# Altium PCB PCB1.PcbDoc
Units mm, origin at the board's own origin, x right, y up, seen from the top; angles counter-clockwise.
Board outline 76.45 x 61.59 mm, 2 copper layers (Top Layer, Bottom Layer); 11 components, 11 nets, 33 pads, 4 vias.
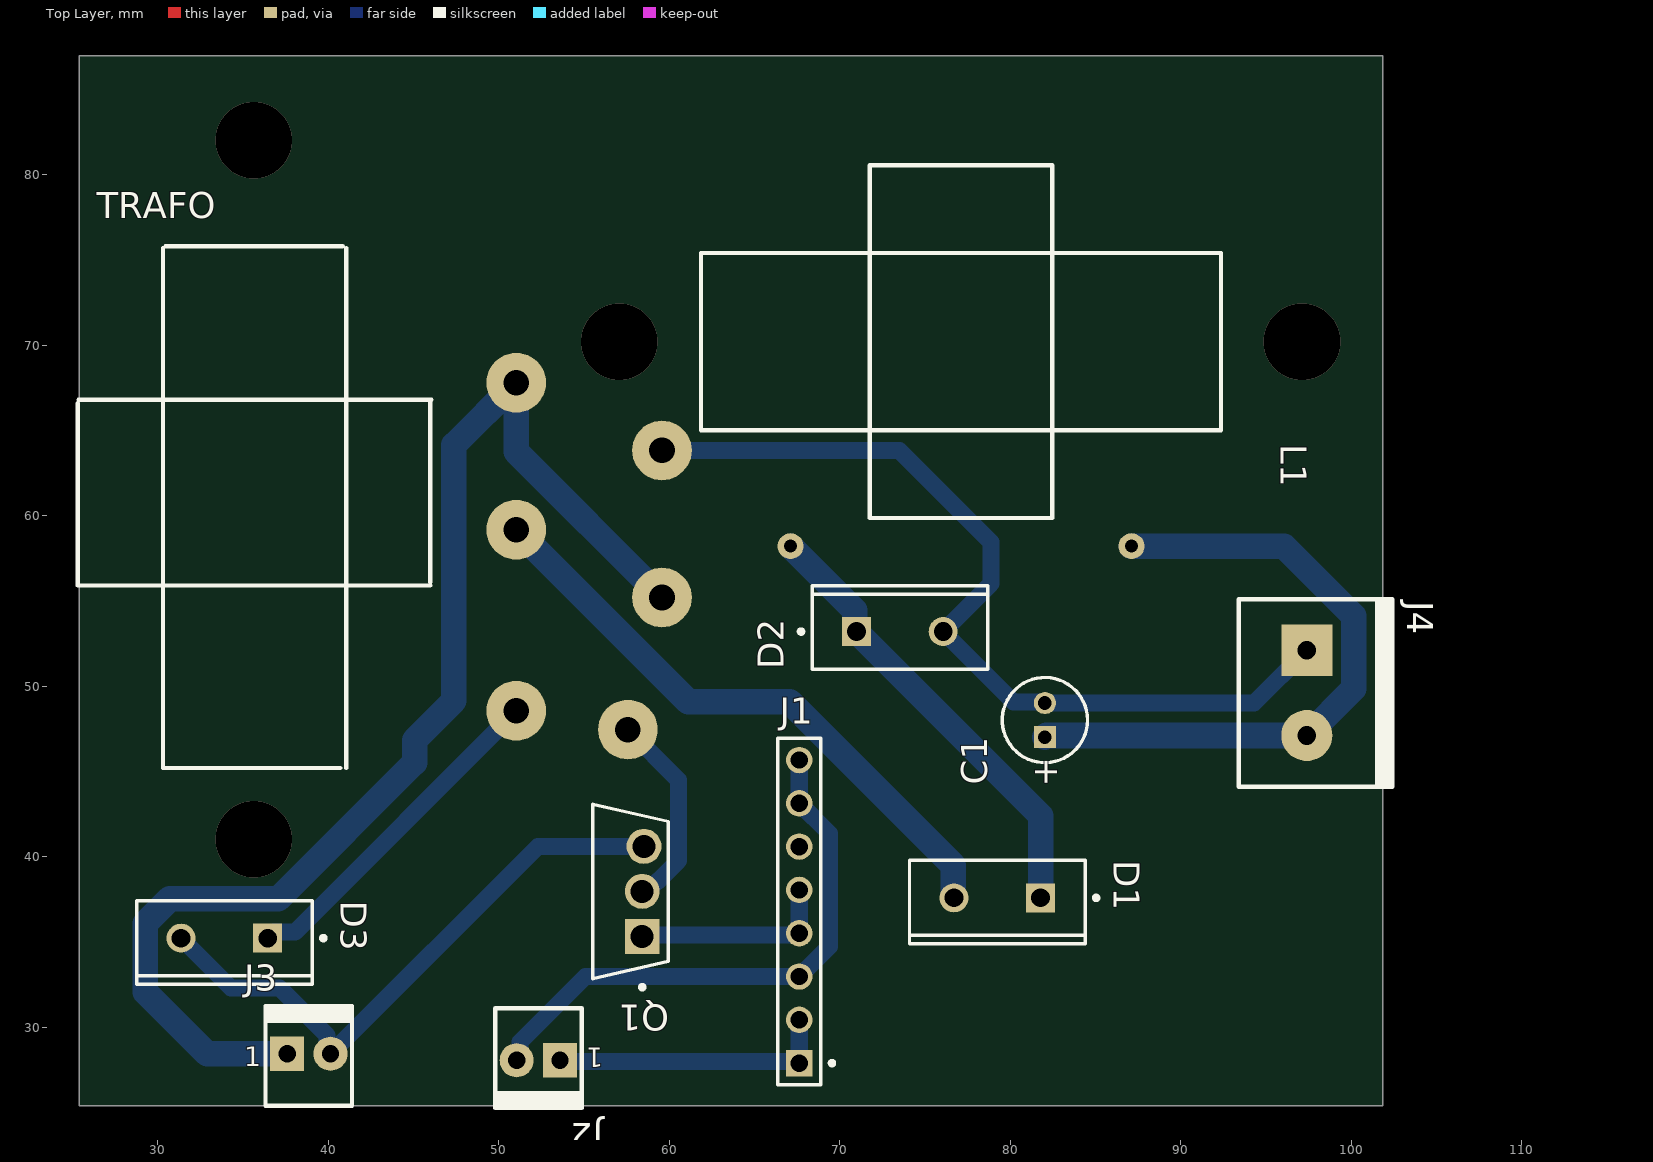
[diagram p0: Top Layer view]
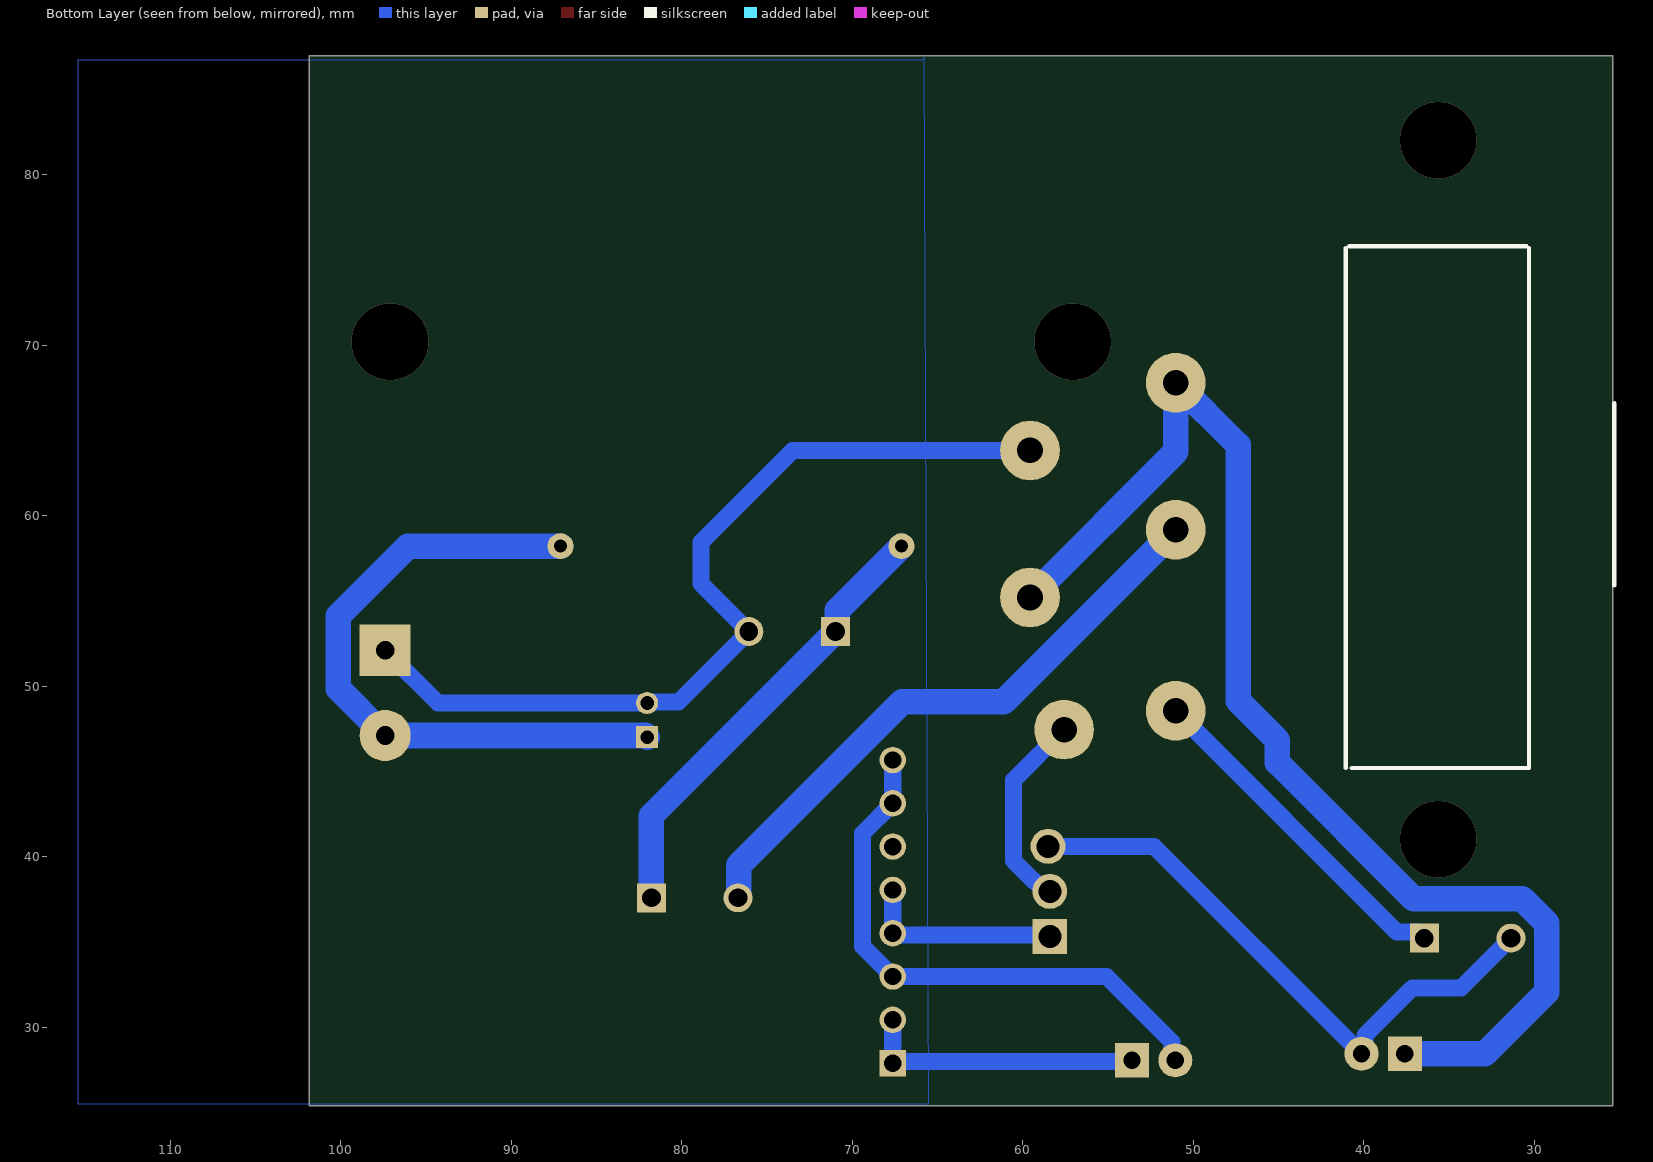
[diagram p1: Bottom Layer view, seen from below]

## Layer stack, top to bottom
Top Solder: solder mask 0.0102, Solder Resist, Dk 3.5
Top Layer: signal copper 0.0356
Dielectric 1: dielectric 0.32, FR-4, Dk 4.8
Bottom Layer: signal copper 0.0356
Bottom Solder: solder mask 0.0102, Solder Resist, Dk 3.5

## Board outline
25.4,25.4 25.4,86.995 101.854,86.995 101.854,25.4

## Design rules (kind name [scope] priority, off if disabled: settings)
Clearance [All] p1: gap=0.5 ignorepadtopadclearanceinfootprint=FALSE
Height [All] p1: minheight=0 maxheight=35 prefheight=12.7
PlaneConnect [All] p1: planeconnectstyle=Relief reliefexpansion=0.508 reliefentries=4 reliefconductorwidth=0.5 reliefairgap=0.5
PolygonConnect [All] p1: connectstyle=Relief reliefconductorwidth=0.5 reliefentries=4 polygonreliefangle="90 Angle" airgapwidth=0.5
RoutingVias [All] p1: holewidth=0.711 width=1.27 viastyle="Through Hole" minholewidth=0.711 minwidth=1.27 maxholewidth=5 maxwidth=5
SolderMaskExpansion [All] p1: expansion=0.102 istentingtop=FALSE
SupplyNets "Schematic Supply Nets_2" [InNet('GND')] p1: voltage=0.000
SupplyNets "Schematic Supply Nets_1" [InNet('GND_P')] p2: voltage=0.000
SupplyNets "Schematic Supply Nets" [InNet('GND_S')] p3: voltage=0.000
Width [ALL - (InNet('NetD1_3') OR InNet('NetD1_1') OR InNet('12V5') OR InNet('100V'))] p1: maxlimit=1 minlimit=1 preferedwidth=1
Width Width_S [(InNet('NetD1_3') OR InNet('NetD1_1') OR InNet('12V5'))] p2: maxlimit=1.5 minlimit=1.5 preferedwidth=1.5
Width Width_P [InNet('100V')] p3: maxlimit=1.5 minlimit=1.5 preferedwidth=1.5
28 further rules are at their usual default settings.

## Components (designator, comment, footprint, x,y, rotation, side; value= is the part's Value field where it differs from the comment)
C1 "4.7uF" Capacitor 82.042,48.022 r90 top
D1 "D1" MUR840 79.248,37.542 r270 top
D2 "D2" MUR840 73.533,53.263 r90 top
D3 "D3" MUR840 33.909,35.179 r270 top
J1 "header 8pin" "Header 8pin" 67.631,36.787 r90 top
J2 "Con_Molex_2_pin" CON_MOLEX_2_vias 53.594,28.067 r180 top
J3 "VIN" CON_MOLEX_2_vias 37.592,28.448 r0 top
J4 "VOUT" Borne_KRE_2pin 97.409,52.117 r270 top
L1 "500uH" Indutor 77.122,70.223 r270 top
Q1 "IRF740PBF" FP-X15-0364-MFG 57.735,37.973 r180 top
TRAFO "Trafo" Trafo_NEE_30/14 35.628,61.539 r0 top

## Footprints (in the part's own frame and the unit in brackets; to place one, negate y for a bottom-side part, rotate by r counter-clockwise, add the part's x,y. Pads: shape width x height; smd on the part's side, far side on the other; paste and mask are expansions set on the pad)
Borne_KRE_2pin [mm]
  rect 3x3 hole 1.1: 1(0,0)
  round 3 hole 1.1: 2(5,0)
  silkscreen extent -3,-4 8,5
Capacitor [mm]
  rect 1.3x1.3 hole 0.8: 1(-1,0)
  round 1.3 hole 0.8: 2(1,0)
  silkscreen extent -2.5,-2.5 2.5,2.5, body extent -2.5,-2.5 2.45,2.5, height 12
CON_MOLEX_2_vias [mm]
  rect 2x2 hole 1.016: 1(0,0)
  round 2 hole 1.016: 2(2.54,0)
  silkscreen extent -1.28,-3.05 3.85,2.8
FP-X15-0364-MFG [mm]
  rect 2.05x2.05 hole 1.35 paste-2539.97 mask+0: 1(-0.685,2.64)
  round 2.05 hole 1.35 paste-2539.97 mask+0: 2(-0.685,0) 3(-0.785,-2.64)
  silkscreen extent -2.22,-5.12 2.22,5.74, body extent -2.42,-5.36 2.42,5.36, height 0.25
"Header 8pin" [mm]
  rect 1.55x1.55 hole 1.016: 1(-8.89,0)
  round 1.55 hole 1.016: 2(-6.35,0) 3(-3.81,0) 4(-1.27,0) 5(1.27,0) 6(3.81,0) 7(6.35,0) 8(8.89,0)
  silkscreen extent -10.16,-2.05 10.16,1.27
Indutor [mil]
  round 60 hole 30: 1(472.44,-393.7) 2(472.44,393.7)
  silkscreen extent -407,-600 407,600, body extent -407,-599 406,599, height 1217
MUR840 [mm]
  rect 1.7x1.7 hole 1.1: 1(-0.05,2.54)
  round 1.7 hole 1.1: 3(-0.05,-2.54)
  silkscreen extent -2.25,-5.15 2.64,5.93, body extent -2.23,-5.15 2.62,5.15, height 19.05
Trafo_NEE_30/14 [mm]
  round 3.5 hole 1.5: P1(15.4,6.275) P2(21.95,-14.075) S1(15.4,-2.35) S2(23.95,2.3) T1(15.4,-12.975) T2(23.95,-6.325)
  silkscreen extent -10.33,-16.33 10.42,14.28, body extent -10.33,-16.33 10.47,14.17, height 28

## Part data
C1: library part "Capacitor Eletro"
D1 D2 D3: library part mur840
J3: library part Con_Molex_2_pin
J4: library part Borne_KRE_2_vias
L1: library part Indutor
Q1: library part CMP-013-00035-1, "Power Field-Effect Transistor, 10A I(D), 400V, 0.55ohm, 1-Element, N-Channel, Silicon, Metal-oxide Semiconductor FET, TO-220AB", Max Operating Temperature=150°C, Pins=3, RoHS Compliant=Yes
TRAFO: "Transformador de 3 enrolamentos"

## Via types
v1: diameter 4.5, hole 4.5, Top Layer to Bottom Layer, 4 vias

## Nets (pads, with @x,y where several pads share a name; then routed paths per layer and width w, separated by ;. In a path a pad name is that pad's centre, name@x,y a point inside that pad or via, vN(x,y) a via of type N, cw(c..) or ccw(c..) an arc to the next point about the centre after c; other vN are vias at no path point)
12V5: C1.1 J4.2 L1.2 | length 38.3
  Bottom Layer w1.5: C1.1 82.137,47.117 J4.2 100.159,49.867 100.159,54.135 96.071,58.223 L1.2
100V: J3.1 TRAFO.P1 TRAFO.T2 | length 74.5
  Bottom Layer w1.5: J3.1 32.893,28.448 29.269,32.072 29.269,36.099 30.709,37.539 37.078,37.539 45.065,45.526 45.065,46.844 47.371,49.15 47.371,64.156 TRAFO.P1 51.028,63.764 TRAFO.T2
GATE: J1.4 J1.5 Q1.1 | length 11.8
  Bottom Layer w1: Q1.1 58.512,35.425 67.539,35.425 J1.4 J1.5
GND: J1.3 J1.7 J1.8 J2.2 | length 33.3
  Bottom Layer w1: J2.2 51.245,28.258 51.245,29.133 55.09,32.977 J1.3 69.406,34.752 69.406,41.362 J1.7 J1.8
GND_P: D3.3 J3.2 Q1.3 | length 35.5
  Bottom Layer w1: D3.3 34.294,32.304 37.15,32.304 39.941,29.514 39.941,28.639 J3.2 52.297,40.613 Q1.3
GND_S: C1.2 D2.3 J4.1 TRAFO.S2 | length 52.1
  Bottom Layer w1: TRAFO.S2 73.498,63.839 78.884,58.453 78.884,56.024 D2.3 ; D2.3@76.207,53.079 80.207,49.079 81.985,49.079 C1.2 94.314,49.022 J4.1
NetD1_1: D1.1 D2.1 L1.1 | length 26.7
  Bottom Layer w1.5: L1.1 70.893,54.452 70.893,53.313 D2.1 81.788,42.418 D1.1
NetD1_3: D1.3 TRAFO.S1 | length 35.7
  Bottom Layer w1.5: TRAFO.S1 61.115,49.102 67.07,49.102 76.67,39.502 76.67,37.63 D1.3
NetD3_1: D3.1 TRAFO.T1 | length 20.1
  Bottom Layer w1: D3.1 36.799,35.579 38.043,35.579 TRAFO.T1
NetQ1_2: Q1.2 TRAFO.P2 | length 11.8
  Bottom Layer w1: TRAFO.P2 60.545,44.497 60.545,39.774 59.359,38.588 59.319,38.588 58.704,37.973 Q1.2
VIN_COMANDO: J1.1 J1.2 J2.1 | length 16.6
  Bottom Layer w1: J2.1 53.679,27.982 67.546,27.982 J1.1 J1.2
pads on no net: J1.6
copper on no net:
  other v1: 35.628,41.039 57.072,70.223 97.122,70.223 35.628,82.039

## Polygon pours and split planes (outlines as drawn)
GND_S on Bottom Layer "GND_S" (solid, shelved, pour order 5): 65.786,86.868 65.913,86.741 115.443,86.741 115.443,25.527 65.532,25.527

## Silkscreen, mask and mechanical layers (free items; w line width, h text height)
Mechanical 1:
  the board outline again, w0.508

## Text inside footprints (layer, text, board x,y; h text height)
C1: Top Overlay "+" at 82.779,44.114 h1.5 r90
J2: Top Overlay "1" at 56.119,28.792 h1.14 r180
J3: Top Overlay "1" at 35.067,27.723 h1.14